# EAGLE board ATmga8_testBoard_v3 (EAGLE 6.5.0)
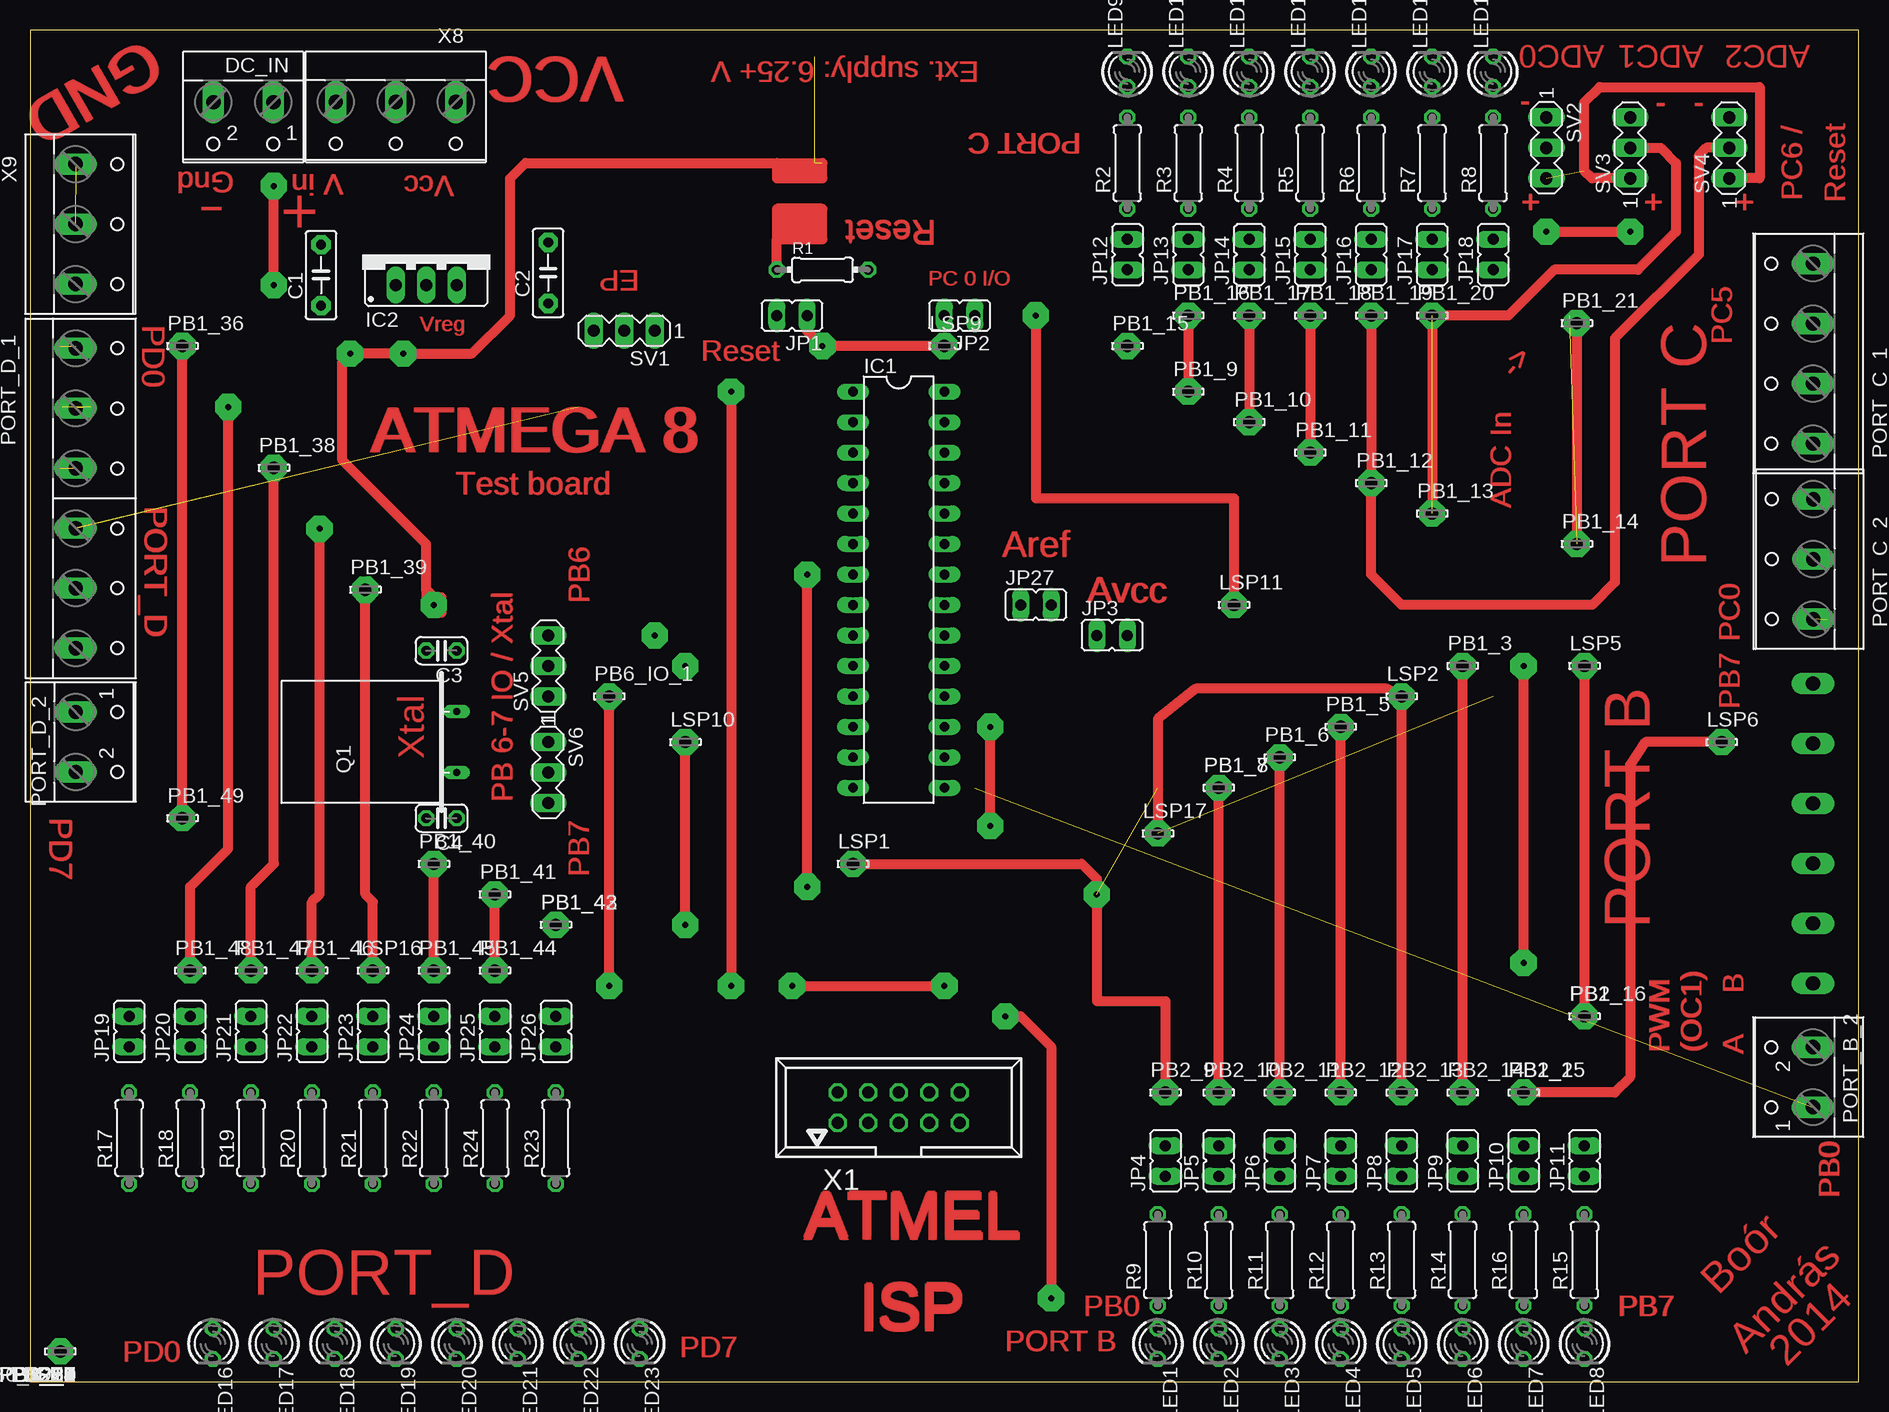
[diagram p0: board, top side]
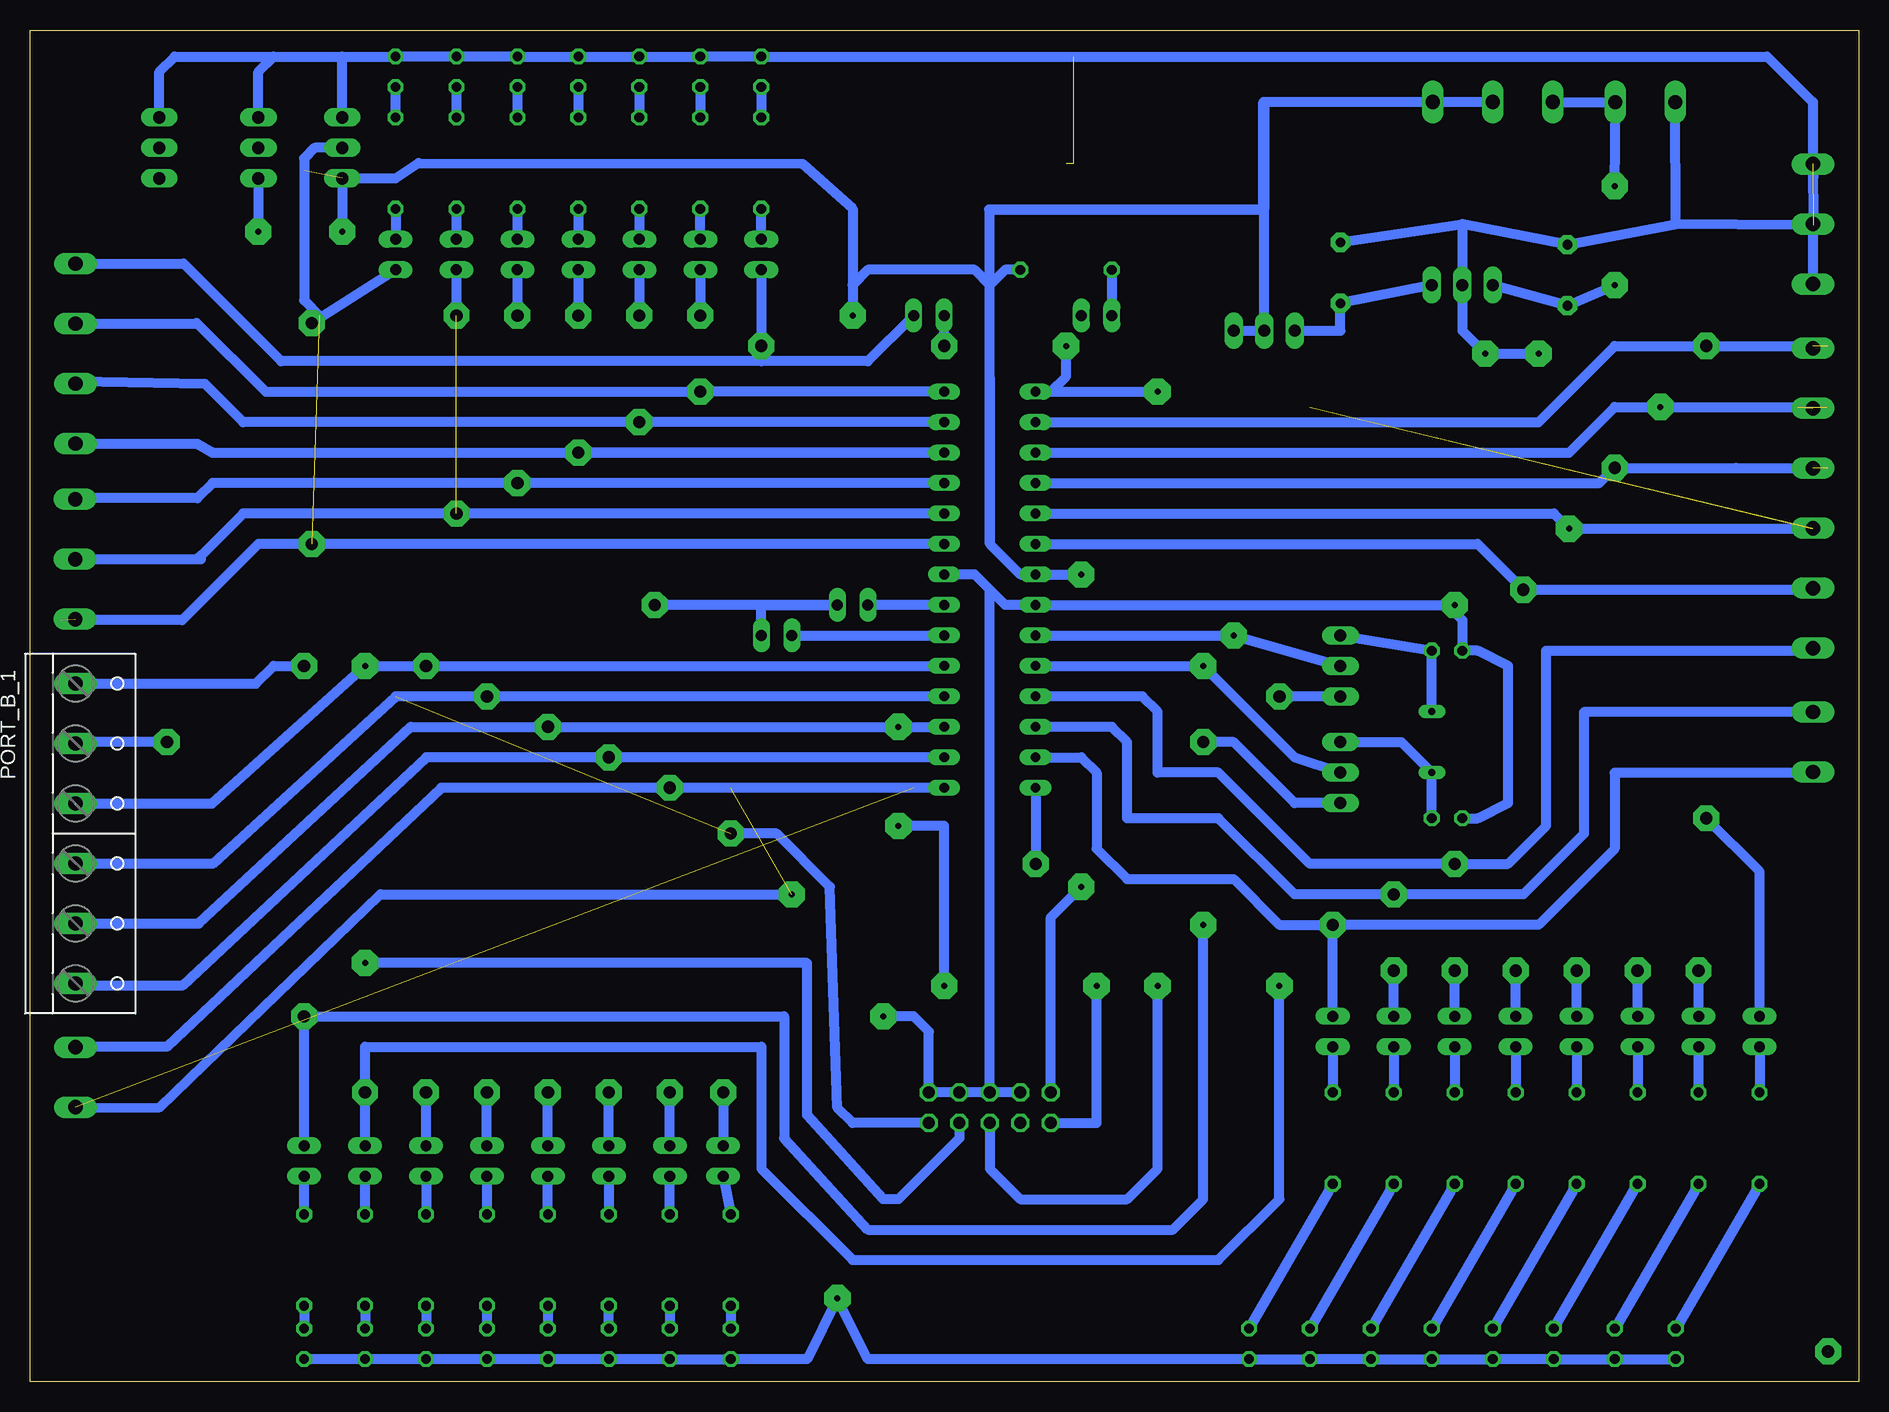
[diagram p1: board, bottom side, seen from below]

Size 152.38 x 112.7 mm. Coordinates in mm from the lower left corner, seen from the top.
Outline: 0,0 152.38,0 152.38,112.7 0,112.7 0,0
Copper layers (1*16): Top 0.035mm / dielectric 1.5mm / Bottom 0.035mm
Design rules "default": minimum track width 10mil, minimum drill 24mil, track to track 8mil, track to pad 8mil, pad to pad 8mil, via to via 8mil, smd to smd 8mil, copper to edge 40mil, drill to drill 8mil, minimum pad ring 10mil, minimum via ring 8mil, stop-mask expansion 4mil, vias tented up to drill 0mil, thermal gap 10mil

## Footprints (pad centres in the part's own frame; a part is rotated, then mirrored left to right if it is on the bottom)
C5B2.5 = drill 0.813 pad 1.6 octagon: 1 -2.54,0; 2 2.54,0
C025-024X044 = drill 0.813 octagon: 1 -1.27,0; 2 1.27,0
W237-102 = drill 1.194 long: 1 -2.5,-1.27; 2 2.5,-1.27
DIL28-3 = drill 0.813 long: 1 -16.51,-3.81; 2 -13.97,-3.81; 3 -11.43,-3.81; 4 -8.89,-3.81; 5 -6.35,-3.81; 6 -3.81,-3.81; 7 -1.27,-3.81; 8 1.27,-3.81; 9 3.81,-3.81; 10 6.35,-3.81; 11 8.89,-3.81; 12 11.43,-3.81; 13 13.97,-3.81; 14 16.51,-3.81; 15 16.51,3.81; 16 13.97,3.81; 17 11.43,3.81; 18 8.89,3.81; 19 6.35,3.81; 20 3.81,3.81; 21 1.27,3.81; 22 -1.27,3.81; 23 -3.81,3.81; 24 -6.35,3.81; 25 -8.89,3.81; 26 -11.43,3.81; 27 -13.97,3.81; 28 -16.51,3.81
78XXS = drill 1.016 long: GND 0,-2.54; IN -2.54,-2.54; OUT 2.54,-2.54
JP1 = drill 0.914 long: 1 0,-1.27; 2 0,1.27
LED3MM = drill 0.813 octagon: A -1.27,0; K 1.27,0
LSP10 = drill 1.016 pad 2.159 octagon: MP 0,0
W237-6 = drill 1.194 long: 1 -12.5,-1.27; 2 -7.5,-1.27; 3 -2.5,-1.27; 4 2.5,-1.27; 5 7.5,-1.27; 6 12.5,-1.27
W237-4 = drill 1.194 long: 1 -7.5,-1.27; 2 -2.5,-1.27; 3 2.5,-1.27; 4 7.5,-1.27
W237-103 = drill 1.194 long: 1 -5,-1.29; 2 0,-1.29; 3 5,-1.29
Q = drill 0.61 long: 1 -2.54,-7.62; 2 2.54,-7.62
0204/7 = drill 0.813 octagon: 1 -3.81,0; 2 3.81,0
0207/7 = drill 0.813 octagon: 1 -3.81,0; 2 3.81,0
MA03-1 = drill 1.016 long: 1 -2.54,0; 2 0,0; 3 2.54,0
057-010-1 = drill 1 octagon: 1 -5.08,-1.27; 2 -5.08,1.27; 3 -2.54,-1.27; 4 -2.54,1.27; 5 0,-1.27; 6 0,1.27; 7 2.54,-1.27; 8 2.54,1.27; 9 5.08,-1.27; 10 5.08,1.27

## Placement (x,y rotation side)
C1  0.33_uF  [C5B2.5]  24.26,92.27 90 top
C2  0.33_uF  [C5B2.5]  43.18,92.46 90 top
C3  [C025-024X044]  34.29,60.96 180 top
C4  [C025-024X044]  34.29,46.99 180 top
DC_IN  [W237-102]  17.78,105.41 180 top
IC1  ATmega8  [DIL28-3]  72.39,66.04 270 top
IC2  7805_CV  [78XXS]  33.02,93.98 0 top
JP1  PC0_Reset  [JP1]  63.5,88.9 90 top
JP2  PC0_IO  [JP1]  77.47,88.9 90 top
JP3  [JP1]  90.17,62.23 270 top
JP4  [JP1]  94.61,18.41 0 top
JP5  [JP1]  99.06,18.41 0 top
JP6  [JP1]  104.14,18.41 0 top
JP7  [JP1]  109.22,18.41 0 top
JP8  [JP1]  114.3,18.41 0 top
JP9  [JP1]  119.38,18.41 0 top
JP10  [JP1]  124.46,18.41 0 top
JP11  [JP1]  129.54,18.41 0 top
JP12  [JP1]  91.44,93.98 0 top
JP13  [JP1]  96.52,93.98 0 top
JP14  [JP1]  101.6,93.98 0 top
JP15  [JP1]  106.68,93.98 0 top
JP16  [JP1]  111.76,93.98 0 top
JP17  [JP1]  116.84,93.98 0 top
JP18  [JP1]  121.92,93.98 0 top
JP19  [JP1]  8.26,29.21 0 top
JP20  [JP1]  13.34,29.21 0 top
JP21  [JP1]  18.41,29.21 0 top
JP22  [JP1]  23.5,29.21 0 top
JP23  [JP1]  28.57,29.21 0 top
JP24  [JP1]  33.66,29.21 0 top
JP25  [JP1]  38.73,29.21 0 top
JP26  [JP1]  43.81,29.21 0 top
JP27  VREF_VCC  [JP1]  83.82,64.77 270 top
LED1  [LED3MM]  93.98,3.17 270 top
LED2  [LED3MM]  99.06,3.17 270 top
LED3  [LED3MM]  104.14,3.17 270 top
LED4  [LED3MM]  109.22,3.17 270 top
LED5  [LED3MM]  114.3,3.17 270 top
LED6  [LED3MM]  119.38,3.17 270 top
LED7  [LED3MM]  124.46,3.17 270 top
LED8  [LED3MM]  129.54,3.17 270 top
LED9  [LED3MM]  91.44,109.22 90 top
LED10  [LED3MM]  96.52,109.22 90 top
LED11  [LED3MM]  101.6,109.22 90 top
LED12  [LED3MM]  106.68,109.22 90 top
LED13  [LED3MM]  111.76,109.22 90 top
LED14  [LED3MM]  116.84,109.22 90 top
LED15  [LED3MM]  121.92,109.22 90 top
LED16  [LED3MM]  15.24,3.17 270 top
LED17  [LED3MM]  20.32,3.17 270 top
LED18  [LED3MM]  25.4,3.17 270 top
LED19  [LED3MM]  30.48,3.17 270 top
LED20  [LED3MM]  35.56,3.17 270 top
LED21  [LED3MM]  40.64,3.17 270 top
LED22  [LED3MM]  45.72,3.17 270 top
LED23  [LED3MM]  50.8,3.17 270 top
LSP1  LSP10  [LSP10]  68.58,43.18 0 top
LSP2  LSP10  [LSP10]  114.3,57.15 0 top
LSP3  LSP10  [LSP10]  2.54,2.54 180 top
LSP4  LSP10  [LSP10]  2.54,2.54 180 top
LSP5  LSP10  [LSP10]  129.54,59.69 0 top
LSP6  LSP10  [LSP10]  140.97,53.34 0 top
LSP7  LSP10  [LSP10]  2.54,2.54 180 top
LSP8  LSP10  [LSP10]  2.54,2.54 180 top
LSP9  LSP10  [LSP10]  76.2,86.36 0 top
LSP10  LSP10  [LSP10]  54.61,53.34 0 top
LSP11  LSP10  [LSP10]  100.33,64.77 0 top
LSP12  LSP10  [LSP10]  2.54,2.54 180 top
LSP13  LSP10  [LSP10]  2.54,2.54 180 top
LSP14  LSP10  [LSP10]  2.54,2.54 180 top
LSP15  LSP10  [LSP10]  2.54,2.54 180 top
LSP16  LSP10  [LSP10]  28.57,34.29 0 top
LSP17  LSP10  [LSP10]  93.98,45.72 0 top
LSP18  LSP10  [LSP10]  2.54,2.54 180 top
LSP19  LSP10  [LSP10]  2.54,2.54 180 top
PB1_1  LSP10  [LSP10]  129.54,30.48 0 top
PB1_2  LSP10  [LSP10]  124.46,24.13 0 top
PB1_3  LSP10  [LSP10]  119.38,59.69 0 top
PB1_5  LSP10  [LSP10]  109.22,54.61 0 top
PB1_6  LSP10  [LSP10]  104.14,52.07 0 top
PB1_7  LSP10  [LSP10]  99.06,49.53 0 top
PB1_8  LSP10  [LSP10]  99.06,49.53 0 top
PB1_9  LSP10  [LSP10]  96.52,82.55 0 top
PB1_10  LSP10  [LSP10]  101.6,80.01 0 top
PB1_11  LSP10  [LSP10]  106.68,77.47 0 top
PB1_12  LSP10  [LSP10]  111.76,74.93 0 top
PB1_13  LSP10  [LSP10]  116.84,72.39 0 top
PB1_14  LSP10  [LSP10]  128.91,69.85 0 top
PB1_15  LSP10  [LSP10]  91.44,86.36 0 top
PB1_16  LSP10  [LSP10]  96.52,88.9 0 top
PB1_17  LSP10  [LSP10]  101.6,88.9 0 top
PB1_18  LSP10  [LSP10]  106.68,88.9 0 top
PB1_19  LSP10  [LSP10]  111.76,88.9 0 top
PB1_20  LSP10  [LSP10]  116.84,88.9 0 top
PB1_21  LSP10  [LSP10]  128.91,88.27 0 top
PB1_22  LSP10  [LSP10]  2.54,2.54 180 top
PB1_23  LSP10  [LSP10]  2.54,2.54 180 top
PB1_24  LSP10  [LSP10]  2.54,2.54 180 top
PB1_25  LSP10  [LSP10]  2.54,2.54 180 top
PB1_26  LSP10  [LSP10]  2.54,2.54 180 top
PB1_27  LSP10  [LSP10]  2.54,2.54 180 top
PB1_28  LSP10  [LSP10]  2.54,2.54 180 top
PB1_29  LSP10  [LSP10]  2.54,2.54 180 top
PB1_30  LSP10  [LSP10]  2.54,2.54 180 top
PB1_31  LSP10  [LSP10]  2.54,2.54 180 top
PB1_32  LSP10  [LSP10]  2.54,2.54 180 top
PB1_33  LSP10  [LSP10]  2.54,2.54 180 top
PB1_34  LSP10  [LSP10]  2.54,2.54 180 top
PB1_35  LSP10  [LSP10]  2.54,2.54 180 top
PB1_36  LSP10  [LSP10]  12.7,86.36 0 top
PB1_37  LSP10  [LSP10]  2.54,2.54 180 top
PB1_38  LSP10  [LSP10]  20.32,76.2 0 top
PB1_39  LSP10  [LSP10]  27.94,66.04 0 top
PB1_40  LSP10  [LSP10]  33.66,43.18 0 top
PB1_41  LSP10  [LSP10]  38.73,40.64 0 top
PB1_42  LSP10  [LSP10]  43.81,38.1 0 top
PB1_43  LSP10  [LSP10]  43.81,38.1 0 top
PB1_44  LSP10  [LSP10]  38.73,34.29 0 top
PB1_45  LSP10  [LSP10]  33.66,34.29 0 top
PB1_46  LSP10  [LSP10]  23.5,34.29 0 top
PB1_47  LSP10  [LSP10]  18.41,34.29 0 top
PB1_48  LSP10  [LSP10]  13.34,34.29 0 top
PB1_49  LSP10  [LSP10]  12.7,46.99 0 top
PB1_50  LSP10  [LSP10]  2.54,2.54 180 top
PB1_51  LSP10  [LSP10]  2.54,2.54 180 top
PB1_52  LSP10  [LSP10]  2.54,2.54 180 top
PB1_53  LSP10  [LSP10]  2.54,2.54 180 top
PB1_54  LSP10  [LSP10]  2.54,2.54 180 top
PB1_55  LSP10  [LSP10]  2.54,2.54 180 top
PB1_56  LSP10  [LSP10]  2.54,2.54 180 top
PB1_57  LSP10  [LSP10]  2.54,2.54 180 top
PB1_58  LSP10  [LSP10]  2.54,2.54 180 top
PB1_59  LSP10  [LSP10]  2.54,2.54 180 top
PB1_60  LSP10  [LSP10]  2.54,2.54 180 top
PB1_61  LSP10  [LSP10]  2.54,2.54 180 top
PB1_62  LSP10  [LSP10]  2.54,2.54 180 top
PB2_1  LSP10  [LSP10]  2.54,2.54 180 top
PB2_2  LSP10  [LSP10]  2.54,2.54 180 top
PB2_3  LSP10  [LSP10]  2.54,2.54 180 top
PB2_4  LSP10  [LSP10]  2.54,2.54 180 top
PB2_5  LSP10  [LSP10]  2.54,2.54 180 top
PB2_6  LSP10  [LSP10]  2.54,2.54 180 top
PB2_7  LSP10  [LSP10]  2.54,2.54 180 top
PB2_8  LSP10  [LSP10]  2.54,2.54 180 top
PB2_9  LSP10  [LSP10]  94.61,24.13 0 top
PB2_10  LSP10  [LSP10]  99.06,24.13 0 top
PB2_11  LSP10  [LSP10]  104.14,24.13 0 top
PB2_12  LSP10  [LSP10]  109.22,24.13 0 top
PB2_13  LSP10  [LSP10]  114.3,24.13 0 top
PB2_14  LSP10  [LSP10]  119.38,24.13 0 top
PB2_15  LSP10  [LSP10]  124.46,24.13 0 top
PB2_16  LSP10  [LSP10]  129.54,30.48 0 top
PB2_17  LSP10  [LSP10]  2.54,2.54 180 top
PB2_18  LSP10  [LSP10]  2.54,2.54 180 top
PB2_19  LSP10  [LSP10]  2.54,2.54 180 top
PB2_20  LSP10  [LSP10]  2.54,2.54 180 top
PB2_21  LSP10  [LSP10]  2.54,2.54 180 top
PB2_22  LSP10  [LSP10]  2.54,2.54 180 top
PB2_23  LSP10  [LSP10]  2.54,2.54 180 top
PB6_IO_1  LSP10  [LSP10]  48.26,57.15 0 top
PB6_IO_2  LSP10  [LSP10]  2.54,2.54 180 top
PORT_B_1  [W237-6]  147.32,45.72 270 bottom
PORT_B_2  [W237-102]  147.32,25.4 90 top
PORT_C_1  [W237-4]  147.32,85.72 90 top
PORT_C_2  [W237-103]  147.32,68.58 90 top
PORT_D_1  PORT_D  [W237-6]  5.08,73.66 270 top
PORT_D_2  [W237-102]  5.08,53.34 270 top
Q1  [Q]  27.94,53.34 90 top
R1  10k  [0204/7]  66.04,92.71 0 top
R2  470R  [0207/7]  91.44,101.6 90 top
R3  470R  [0207/7]  96.52,101.6 90 top
R4  470R  [0207/7]  101.6,101.6 90 top
R5  470R  [0207/7]  106.68,101.6 90 top
R6  470R  [0207/7]  111.76,101.6 90 top
R7  470R  [0207/7]  116.84,101.6 90 top
R8  470R  [0207/7]  121.92,101.6 90 top
R9  470R  [0207/7]  93.98,10.16 90 top
R10  470R  [0207/7]  99.06,10.16 90 top
R11  470R  [0207/7]  104.14,10.16 90 top
R12  470R  [0207/7]  109.22,10.16 90 top
R13  470R  [0207/7]  114.3,10.16 90 top
R14  470R  [0207/7]  119.38,10.16 90 top
R15  470R  [0207/7]  129.54,10.16 90 top
R16  470R  [0207/7]  124.46,10.16 90 top
R17  470R  [0207/7]  8.26,20.32 90 top
R18  470R  [0207/7]  13.34,20.32 90 top
R19  470R  [0207/7]  18.41,20.32 90 top
R20  470R  [0207/7]  23.5,20.32 90 top
R21  470R  [0207/7]  28.57,20.32 90 top
R22  470R  [0207/7]  33.66,20.32 90 top
R23  470R  [0207/7]  43.81,20.32 90 top
R24  470R  [0207/7]  38.73,20.32 90 top
SV1  Power  [MA03-1]  49.53,87.63 180 top
SV2  Pot 1  [MA03-1]  126.36,102.87 270 top
SV3  Pot 2  [MA03-1]  133.35,102.87 90 top
SV4  Pot 3  [MA03-1]  141.6,102.87 90 top
SV5  Xtal/PB6  [MA03-1]  43.18,59.69 90 top
SV6  Xtal/PB7  [MA03-1]  43.18,50.8 270 top
X1  057-010-1  [057-010-1]  72.39,22.86 0 top
X8  VCC_out  [W237-103]  30.48,105.41 180 top
X9  GND_out  [W237-103]  5.08,96.52 270 top

## Library data of the parts
C1 C2 = capacitor-wima
C3 C4 R2-R24 = rcl
DC_IN PORT_B_2 PORT_D_2 = con-wago-500; MPN: 237-102; OC_FARNELL: unknown; OC_NEWARK: 70K9898
IC1 = ic-package
IC2 = v-reg
JP1-JP27 = jumper
LED1-LED23 = led
LSP1-LSP19 PB1_1-PB1_3 PB1_5-PB1_62 PB2_1-PB2_23 PB6_IO_1 PB6_IO_2 = solpad
PORT_B_1 PORT_C_1 PORT_D_1 = con-wago-500; OC_FARNELL: unknown; OC_NEWARK: unknown
PORT_C_2 X8 X9 = con-wago-500; MPN: 237-103; OC_FARNELL: unknown; OC_NEWARK: 18M7116
Q1 = special
R1 = resistor
SV1-SV6 = con-lstb; OC_FARNELL: unknown; OC_NEWARK: unknown
X1 = con-panduit; OC_FARNELL: unknown; OC_NEWARK: unknown

## Nets
AVCC: IC1.19 PB1_3.MP PORT_B_1.3 X1.7
GND: C1.2 C2.2 C3.2 C4.2 DC_IN.2 IC1.8 IC1.22 IC2.GND LED1.K LED2.K LED3.K LED4.K LED5.K LED6.K LED7.K LED8.K LED9.K LED10.K LED11.K LED12.K LED13.K LED14.K LED15.K LED16.K LED17.K LED18.K LED19.K LED20.K LED21.K LED22.K LED23.K SV2.1 SV3.3 SV4.3 X1.4 X1.6 X1.8 X1.10
N$1: C2.1 IC2.OUT SV1.3
N$2: C1.1 DC_IN.1 IC2.IN X8.3
N$3: IC1.1 JP1.1 JP2.2 LSP9.MP X1.5
N$4: LSP6.MP PB1_2.MP PORT_B_1.2
N$5: IC1.14 LSP1.MP
N$6: LSP3.MP LSP4.MP
N$7: LSP5.MP PB1_1.MP PORT_B_1.1
N$8: PB1_22.MP PB2_1.MP
N$9: PB1_23.MP PB2_2.MP
N$10: PB1_24.MP PB2_3.MP
N$11: LSP13.MP PB2_4.MP
N$12: LSP8.MP PB6_IO_2.MP
N$13: IC1.20 JP3.1
N$14: LSP7.MP LSP12.MP
N$15: IC1.23 PB1_14.MP PORT_C_2.1 SV2.2
N$16: IC1.24 PB1_13.MP PORT_C_2.2 SV3.2
N$17: IC1.25 PB1_12.MP PORT_C_2.3 SV4.2
N$18: IC1.26 PB1_11.MP PORT_C_1.1
N$19: IC1.27 PB1_10.MP PORT_C_1.2
N$20: IC1.28 PB1_9.MP PORT_C_1.3
N$21: JP2.1 PORT_C_1.4
N$22: JP1.2 R1.1
N$23: PB1_25.MP PB2_5.MP
N$24: PB1_26.MP PB2_6.MP
N$25: IC1.10 SV6.2
N$26: IC1.9 SV5.2
N$27: IC1.2 PB1_36.MP PORT_D_1.1
N$28: IC1.3 PB1_37.MP PORT_D_1.2
N$29: IC1.4 PB1_38.MP PORT_D_1.3
N$30: IC1.5 LSP15.MP PORT_D_1.4
N$31: IC1.6 PB1_39.MP PORT_D_1.5
N$32: PB1_28.MP PB2_8.MP
N$33: C4.1 Q1.1 SV6.1
N$34: C3.1 Q1.2 SV5.3
N$35: LSP10.MP SV6.3
N$36: PB6_IO_1.MP SV5.1
N$37: IC1.11 PB1_40.MP PORT_D_1.6
N$38: IC1.12 PB1_41.MP PORT_D_2.1
N$39: IC1.13 PB1_42.MP PORT_D_2.2
N$40: IC1.18 LSP17.MP PORT_B_1.4 X1.9
N$41: IC1.17 PB1_5.MP PORT_B_1.5 X1.1
N$42: IC1.16 PB1_6.MP PORT_B_1.6
N$43: IC1.15 PB1_7.MP PORT_B_2.1
N$44: LSP2.MP PB1_8.MP PORT_B_2.2
N$45: PB1_27.MP PB2_7.MP
N$46: IC1.21 JP27.1
N$47: JP4.1 R9.2
N$48: JP5.1 R10.2
N$49: JP6.1 R11.2
N$50: JP7.1 R12.2
N$51: JP8.1 R13.2
N$52: JP9.1 R14.2
N$53: JP11.1 R15.2
N$54: JP10.1 R16.2
N$55: JP12.1 PB1_15.MP
N$56: JP13.1 PB1_16.MP
N$57: JP14.1 PB1_17.MP
N$58: JP15.1 PB1_18.MP
N$59: JP16.1 PB1_19.MP
N$60: JP17.1 PB1_20.MP
N$61: JP18.1 PB1_21.MP
N$62: JP12.2 R2.1
N$63: JP13.2 R3.1
N$64: JP14.2 R4.1
N$65: JP15.2 R5.1
N$66: JP16.2 R6.1
N$67: JP17.2 R7.1
N$68: JP18.2 R8.1
N$69: LED1.A R9.1
N$70: LED2.A R10.1
N$71: LED3.A R11.1
N$72: LED4.A R12.1
N$73: LED5.A R13.1
N$74: LED7.A R16.1
N$75: LED6.A R14.1
N$76: LED8.A R15.1
N$77: LED9.A R2.2
N$78: LED10.A R3.2
N$79: LED11.A R4.2
N$80: LED12.A R5.2
N$81: LED13.A R6.2
N$82: LED14.A R7.2
N$83: LED15.A R8.2
N$84: JP4.2 PB2_9.MP
N$85: JP5.2 PB2_10.MP
N$86: JP6.2 PB2_11.MP
N$87: JP7.2 PB2_12.MP
N$88: JP8.2 PB2_13.MP
N$89: JP9.2 PB2_14.MP
N$90: JP10.2 PB2_15.MP
N$91: JP11.2 PB2_16.MP
N$92: PB1_35.MP PB1_50.MP
N$93: PB1_34.MP PB1_51.MP
N$94: PB1_33.MP PB1_52.MP
N$95: LSP18.MP PB1_32.MP
N$96: LSP14.MP PB1_53.MP
N$97: PB1_31.MP PB1_54.MP
N$98: PB1_30.MP PB1_55.MP
N$99: PB1_29.MP PB1_56.MP
N$100: JP19.1 R17.2
N$101: JP20.1 R18.2
N$102: JP21.1 R19.2
N$103: JP22.1 R20.2
N$104: JP23.1 R21.2
N$105: JP24.1 R22.2
N$106: JP26.1 R23.2
N$107: JP25.1 R24.2
N$108: LED16.A R17.1
N$109: LED17.A R18.1
N$110: LED18.A R19.1
N$111: LED19.A R20.1
N$112: LED20.A R21.1
N$113: LED22.A R24.1
N$114: LED21.A R22.1
N$115: LED23.A R23.1
N$116: JP19.2 PB1_49.MP
N$117: JP20.2 PB1_48.MP
N$118: JP21.2 PB1_47.MP
N$119: JP22.2 PB1_46.MP
N$120: JP23.2 LSP16.MP
N$121: JP24.2 PB1_45.MP
N$122: JP25.2 PB1_44.MP
N$123: JP26.2 PB1_43.MP
N$124: PB1_57.MP PB2_17.MP
N$125: PB1_58.MP PB2_18.MP
N$126: LSP19.MP PB2_19.MP
N$127: PB1_59.MP PB2_20.MP
N$128: PB1_60.MP PB2_21.MP
N$129: PB1_61.MP PB2_22.MP
N$130: PB1_62.MP PB2_23.MP
N$131: SV1.1 X1.2
N$137: X9.1 X9.2 X9.3
VCC: IC1.7 JP3.2 JP27.2 LSP11.MP R1.2 SV1.2 SV2.3 SV3.1 SV4.1 X8.1 X8.2

## Tracks (layer width: path | path; a pad name or v marks a point on that pad's centre or on a via)
AVCC  (via drill 0.5 pad 2.18)
  Top 0.813: v124.46,34.92 v124.46,59.69
  Bottom 0.813: PORT_B_1.3 137.2,48.22 v124.46,59.69 PB1_3.MP IC1.19 | X1.7 74.93,20.32 80.01,15.24 81.28,15.24 87.63,22.23 87.63,34.92 v124.46,34.92
GND  (via drill 0.5 pad 2.18)  (3 unrouted)
  Top 0.813: v81.28,30.48 82.55,30.48 85.09,27.94 v85.09,6.99 | 62.23,101.6 41.27,101.6 40.01,100.33 40.01,88.9 36.83,85.72 v31.11,85.72 v26.67,85.72 26.04,85.09 26.04,76.83 33.02,69.85 33.02,66.04 | 62.23,101.6 65.41,101.6 | 65.41,101.6 66.04,101.6 66.04,100.33 62.23,100.33 62.23,101.6 | 65.41,101.6 65.41,100.97 62.87,100.97 | v33.66,64.77 33.66,65.41 | 33.66,65.41 33.02,66.04 | 33.02,66.04 33.02,64.77 33.66,64.14 34.29,64.14 34.29,65.41 33.66,65.41
  Bottom 0.813: C4.2 31.75,46.99 29.21,48.26 29.21,59.69 31.75,60.96 C3.2 33.02,63.5 34.29,64.77 | 72.39,66.04 71.12,64.77 IC1.8 34.29,64.77 | 72.39,66.04 73.66,67.31 IC1.22 | X1.6 72.39,66.04 | X1.6 X1.8 X1.10 77.47,29.21 78.74,30.48 v81.28,30.48 | X1.4 X1.6 | LED8.K LED7.K LED6.K LED5.K LED4.K LED3.K LED2.K LED1.K 87.63,1.91 v85.09,6.99 82.55,1.91 LED23.K LED22.K LED21.K LED20.K LED19.K LED18.K LED17.K LED16.K | 15.24,96.52 C1.2 33.02,96.52 | 15.24,96.52 15.24,96.48 DC_IN.2 15.24,96.52 | 33.02,96.52 IC2.GND 33.02,87.63 v31.11,85.72 v26.67,85.72 | C2.2 33.02,96.52 | 3.77,96.44 5,96.44 15.24,96.52 | 3.81,101.54 3.81,106.68 7.62,110.49 LED9.K LED10.K LED11.K LED12.K LED13.K LED14.K LED15.K 126.36,110.49 | SV2.1 126.36,110.49 | SV3.3 133.35,109.22 132.08,110.49 | 132.08,110.49 126.36,110.49 | SV4.3 141.6,109.22 140.34,110.49 132.08,110.49 | 34.29,64.77 v33.66,64.77
N$1
  Bottom 0.813: IC2.OUT C2.1 43.18,87.63 SV1.3
N$2  (via drill 0.5 pad 2.18)  (1 unrouted)
  Top 0.813: v20.32,91.44 20.32,99.69
  Bottom 0.813: IC2.IN C1.1 v20.32,91.44 | 20.32,99.69 20.36,99.73 DC_IN.1 20.28,106.7 X8.3
N$3  (via drill 0.5 pad 2.18)  (1 unrouted)
  Top 0.813: JP1.1 64.77,87.63 66.04,86.36 LSP9.MP | v58.42,82.55 v58.42,33.02
  Bottom 0.813: IC1.1 67.31,82.55 | 67.31,82.55 66.04,83.82 66.04,86.36 | LSP9.MP JP2.2 | X1.5 72.39,17.78 69.85,15.24 60.96,15.24 58.42,17.78 v58.42,33.02 | 67.31,82.55 v58.42,82.55
N$4  (1 unrouted)
  Top 0.813: LSP6.MP 134.62,53.34 133.35,51.44 133.35,25.4 132.08,24.13 PB1_2.MP
  Bottom 0.813: LSP6.MP 149.74,53.34 PORT_B_1.2
N$5
  Top 0.813: LSP1.MP 87.63,43.18 88.9,41.91 88.9,31.75 94.61,31.75 94.61,24.77
  Bottom 0.813: IC1.14 LSP1.MP
N$6  (1 unrouted)
N$7
  Top 0.813: LSP5.MP PB1_1.MP
  Bottom 0.813: 148.79,58.22 PORT_B_1.1 133.55,58.22 132.08,59.69 LSP5.MP
N$8  (1 unrouted)
N$9  (1 unrouted)
N$10  (1 unrouted)
N$11  (1 unrouted)
N$12  (1 unrouted)
N$13
  Bottom 0.813: JP3.1 IC1.20
N$14  (1 unrouted)
N$15  (2 unrouted)
  Bottom 0.813: IC1.23 PB1_14.MP 133.35,69.85 139.7,63.5 149.76,63.5 | SV2.2 128.65,102.87 129.54,101.98 129.54,90.17 128.27,88.9 128.91,88.9
N$16  (1 unrouted)
  Top 0.813: SV3.2 135.89,102.87 137.16,101.6 137.16,95.89 133.99,92.71 127,92.71 123.19,88.9 116.84,88.9
  Bottom 0.813: IC1.24 PB1_13.MP 134.62,72.39 138.11,68.9 | 138.11,68.9 138.43,68.58 | PORT_C_2.2 138.11,68.58 138.11,68.9
N$17
  Top 0.813: SV4.2 139.7,102.87 139.06,102.23 139.06,93.98 132.08,87 132.08,66.67 130.18,64.77 114.3,64.77 111.76,67.31 PB1_12.MP
  Bottom 0.813: IC1.25 PB1_12.MP 137.16,74.93 138.43,73.66 148.61,73.66 PORT_C_2.3
N$18
  Bottom 0.813: 148.71,78.22 138.42,78.22 | 138.42,78.22 137.16,77.47 IC1.26 PB1_11.MP | PORT_C_1.1 138.42,78.22
N$19
  Bottom 0.813: 148.59,83.37 137.79,83.19 134.62,80.01 IC1.27 PB1_10.MP | 148.59,83.37 148.8,83.38 | PORT_C_1.2 148.59,83.37
N$20
  Bottom 0.813: IC1.28 PB1_9.MP 132.72,82.55 138.52,88.29 138.52,88.22 PORT_C_1.3
N$21
  Bottom 0.813: JP2.1 82.55,85.09 131.44,85.09 139.58,93.22 PORT_C_1.4
N$22
  Top 0.813: R1.1 62.23,95.25 | 62.23,95.25 66.04,95.25 66.04,97.79 62.23,97.79 62.23,97.16 | 62.23,97.16 62.23,95.89 | 64.14,95.89 65.41,95.89 65.41,97.16 62.23,97.16 | 62.23,97.16 62.87,96.52 64.77,96.52 64.14,95.89 | 64.14,95.89 62.23,95.89 | 62.23,95.89 62.23,95.25
  Bottom 0.813: R1.1 JP1.2
N$23  (1 unrouted)
N$24  (1 unrouted)
N$25  (via drill 0.5 pad 2.18)
  Bottom 0.813: IC1.10 v54.61,59.69 46.99,52.07 SV6.2
N$26  (via drill 0.5 pad 2.18)
  Bottom 0.813: IC1.9 v52.07,62.23 SV5.2
N$27  (via drill 0.5 pad 2.18)  (1 unrouted)
  Bottom 0.813: IC1.2 26.67,80.01 20.32,86.36 PB1_36.MP | PB1_36.MP 5.28,86.36 | 5.28,86.36 3.81,86.36 PORT_D_1.1 5.28,86.36 | PB1_36.MP 2.54,86.36
  other vias: 12.7,86.36
N$28  (via drill 0.5 pad 2.18)  (2 unrouted)
  Bottom 0.813: IC1.3 24.13,77.47 20.32,81.28 v16.51,81.28 2.66,81.28 PORT_D_1.2
N$29  (via drill 0.5 pad 2.18)  (1 unrouted)
  Bottom 0.813: IC1.4 21.59,74.93 PB1_38.MP | PB1_38.MP 10.2,76.2 PORT_D_1.3 | PB1_38.MP 3.81,76.2 | PB1_38.MP 2.54,76.2
  other vias: 20.32,76.2
N$30  (via drill 0.5 pad 2.18)  (2 unrouted)
  Bottom 0.813: IC1.5 25.4,72.39 v24.13,71.12 3.85,71.12 PORT_D_1.4
N$31  (via drill 0.5 pad 2.18)
  Bottom 0.813: IC1.6 31.75,69.85 PB1_39.MP 3.93,66.04 PORT_D_1.5
  other vias: 27.94,66.04
N$32  (1 unrouted)
N$33
  Bottom 0.813: SV6.1 38.1,53.34 Q1.1 C4.1
N$34
  Bottom 0.813: SV5.3 C3.1 Q1.2
N$35
  Bottom 0.813: SV6.3 46.99,48.26 52.07,53.34 LSP10.MP
N$36
  Bottom 0.813: SV5.1 PB6_IO_1.MP
N$37  (via drill 0.5 pad 2.18)
  Bottom 0.813: PORT_D_1.6 4.01,60.96 26.04,60.96 26.04,46.35 29.21,43.18 PB1_40.MP 45.72,43.18 53.34,50.8 58.42,50.8 58.42,55.88 59.69,57.15 IC1.11
  other vias: 33.66,43.18
N$38  (via drill 0.5 pad 2.18)
  Bottom 0.813: PORT_D_2.1 22.9,55.84 22.9,45.68 27.94,40.64 PB1_41.MP 46.99,40.64 53.34,46.99 60.96,46.99 60.96,53.34 62.23,54.61 IC1.12
  other vias: 38.73,40.64
N$39
  Bottom 0.813: IC1.13 64.77,52.07 63.5,50.8 63.5,44.45 60.96,41.91 52.07,41.91 48.26,38.1 PB1_42.MP 26.67,38.1 20.32,44.45 20.32,50.8 3.85,50.8 | 3.85,50.8 PORT_D_2.2 3.81,50.8 3.85,50.8
N$40  (1 unrouted)
  Bottom 0.813: IC1.18 121.92,57.15 137.16,43.18 149.82,43.18 PORT_B_1.4 | X1.9 83.82,21.59 85.09,22.86 85.72,41.27 90.17,45.72 LSP17.MP
N$41  (via drill 0.5 pad 2.18)
  Top 0.813: v63.5,33.02 v76.2,33.02 | v80.01,46.35 v80.01,54.61
  Bottom 0.813: PORT_B_1.5 138.31,38.22 120.65,54.61 PB1_5.MP v80.01,54.61 IC1.17 | X1.1 63.5,21.59 v63.5,33.02 | v76.2,33.02 76.2,46.35 v80.01,46.35
N$42
  Bottom 0.813: PORT_B_1.6 148.39,33.02 139.7,33.02 119.38,52.07 PB1_6.MP IC1.16
N$43  (via drill 0.5 pad 2.18)  (3 unrouted)
  Bottom 0.813: IC1.15 PB1_7.MP 118.11,49.53 | PORT_B_2.1 149.86,22.86 141.56,22.9 123.19,40.64 v88.9,40.64
N$44
  Bottom 0.813: PB1_8.MP 118.11,49.53 140.97,27.94 148.55,27.94 PORT_B_2.2
N$45  (1 unrouted)
N$46
  Bottom 0.813: IC1.21 JP27.1
N$47
  Bottom 0.813: JP4.1 R9.2
N$48
  Bottom 0.813: R10.2 JP5.1
N$49
  Bottom 0.813: JP6.1 R11.2
N$50
  Bottom 0.813: R12.2 JP7.1
N$51
  Bottom 0.813: JP8.1 R13.2
N$52
  Bottom 0.813: JP9.1 R14.2
N$53
  Bottom 0.813: R15.2 JP11.1
N$54
  Bottom 0.813: R16.2 JP10.1
N$55
  Bottom 0.813: JP12.1 PB1_15.MP 91.44,85.09
N$56
  Top 0.813: PB1_16.MP 96.52,82.55
  Bottom 0.813: JP13.1 PB1_16.MP
N$57
  Top 0.813: PB1_17.MP 101.6,80.01
  Bottom 0.813: JP14.1 PB1_17.MP
N$58
  Top 0.813: PB1_18.MP 106.68,77.47
  Bottom 0.813: JP15.1 PB1_18.MP
N$59
  Top 0.813: PB1_19.MP 111.76,74.93
  Bottom 0.813: JP16.1 PB1_19.MP
N$60
  Top 0.813: PB1_20.MP 116.84,72.39
  Bottom 0.813: JP17.1 PB1_20.MP
N$61
  Top 0.813: PB1_21.MP 128.91,69.85
  Bottom 0.813: JP18.1 PB1_21.MP
N$62
  Bottom 0.813: JP12.2 R2.1
N$63
  Bottom 0.813: JP13.2 R3.1
N$64
  Bottom 0.813: R4.1 JP14.2
N$65
  Bottom 0.813: R5.1 JP15.2
N$66
  Bottom 0.813: R6.1 JP16.2
N$67
  Bottom 0.813: R7.1 JP17.2
N$68
  Bottom 0.813: R8.1 JP18.2
N$69
  Bottom 0.813: R9.1 LED1.A
N$70
  Bottom 0.813: R10.1 LED2.A
N$71
  Bottom 0.813: LED3.A R11.1
N$72
  Bottom 0.813: R12.1 LED4.A
N$73
  Bottom 0.813: R13.1 LED5.A
N$74
  Bottom 0.813: R16.1 LED7.A
N$75
  Bottom 0.813: R14.1 LED6.A
N$76
  Bottom 0.813: R15.1 LED8.A
N$77
  Bottom 0.813: LED9.A R2.2
N$78
  Bottom 0.813: LED10.A R3.2
N$79
  Bottom 0.813: LED11.A R4.2
N$80
  Bottom 0.813: LED12.A R5.2
N$81
  Bottom 0.813: LED13.A R6.2
N$82
  Bottom 0.813: LED14.A R7.2
N$83
  Bottom 0.813: R8.2 LED15.A
N$84
  Bottom 0.813: PB2_9.MP JP4.2
N$85
  Top 0.813: PB2_10.MP 99.06,49.53
  Bottom 0.813: JP5.2 PB2_10.MP
N$86
  Top 0.813: PB2_11.MP 104.14,52.07
  Bottom 0.813: JP6.2 PB2_11.MP
N$87
  Top 0.813: PB2_12.MP 109.22,54.61
  Bottom 0.813: JP7.2 PB2_12.MP
N$88
  Top 0.813: PB2_13.MP 114.3,57.15 113.03,57.78 97.16,57.78 93.98,55.24 93.98,45.72
  Bottom 0.813: JP8.2 PB2_13.MP
N$89
  Top 0.813: PB2_14.MP 119.38,59.69
  Bottom 0.813: JP9.2 PB2_14.MP
N$90  (via drill 0.5 pad 2.18)
  Top 0.813: v48.26,33.02 48.26,57.15
  Bottom 0.813: v48.26,33.02 48.26,15.24 53.34,10.16 83.82,10.16 91.44,17.78 91.44,27.94 124.46,27.94 PB2_15.MP JP10.2
N$91  (via drill 0.5 pad 2.18)
  Top 0.813: v54.61,38.1 54.61,53.34
  Bottom 0.813: v54.61,38.1 54.61,15.24 57.15,12.7 82.55,12.7 89.53,20.32 89.53,30.48 PB2_16.MP JP11.2
N$92  (1 unrouted)
N$93  (1 unrouted)
N$94  (1 unrouted)
N$95  (1 unrouted)
N$96  (1 unrouted)
N$97  (1 unrouted)
N$98  (1 unrouted)
N$99  (1 unrouted)
N$100
  Bottom 0.813: JP19.1 R17.2
N$101
  Bottom 0.813: R18.2 JP20.1
N$102
  Bottom 0.813: JP21.1 R19.2
N$103
  Bottom 0.813: JP22.1 R20.2
N$104
  Bottom 0.813: JP23.1 R21.2
N$105
  Bottom 0.813: JP24.1 R22.2
N$106
  Bottom 0.813: JP26.1 R23.2
N$107
  Bottom 0.813: JP25.1 R24.2
N$108
  Bottom 0.813: R17.1 LED16.A
N$109
  Bottom 0.813: R18.1 LED17.A
N$110
  Bottom 0.813: LED18.A R19.1
N$111
  Bottom 0.813: R20.1 LED19.A
N$112
  Bottom 0.813: R21.1 LED20.A
N$113
  Bottom 0.813: R24.1 LED22.A
N$114
  Bottom 0.813: R22.1 LED21.A
N$115
  Bottom 0.813: R23.1 LED23.A
N$116
  Top 0.813: PB1_49.MP 12.7,86.36
  Bottom 0.813: JP19.2 8.26,42.55 PB1_49.MP
N$117
  Top 0.813: PB1_48.MP 13.34,41.27 16.51,44.45 16.51,81.28
  Bottom 0.813: JP20.2 PB1_48.MP
N$118
  Top 0.813: PB1_47.MP 18.41,41.27 20.32,43.18 20.32,76.2
  Bottom 0.813: JP21.2 PB1_47.MP
N$119
  Top 0.813: PB1_46.MP 23.5,40.01 24.13,40.64 24.13,71.12
  Bottom 0.813: JP22.2 PB1_46.MP
N$120
  Top 0.813: LSP16.MP 28.57,40.01 27.94,40.64 27.94,66.04
  Bottom 0.813: JP23.2 LSP16.MP
N$121
  Top 0.813: PB1_45.MP 33.66,43.18
  Bottom 0.813: JP24.2 PB1_45.MP
N$122
  Top 0.813: PB1_44.MP 38.73,40.01
  Bottom 0.813: JP25.2 PB1_44.MP
N$123
  Bottom 0.813: JP26.2 PB1_43.MP
N$124  (1 unrouted)
N$125  (1 unrouted)
N$126  (1 unrouted)
N$127  (1 unrouted)
N$128  (1 unrouted)
N$129  (1 unrouted)
N$130  (1 unrouted)
N$131  (via drill 0.5 pad 2.18)  (1 unrouted)
  Top 0.813: v64.77,41.27 64.77,67.31
  Bottom 0.813: X1.2 67.31,38.73 v64.77,41.27 | SV1.1 49.53,87.63 49.53,97.73 | 49.53,106.68 49.53,97.73 | 49.53,97.73 72.45,97.73 72.39,69.85 69.85,67.31 64.77,67.31
N$133  (via drill 0.5 pad 2.18)
  other vias: 66.04,86.36
N$135  (via drill 0.5 pad 2.18)
  other vias: 20.32,99.69
N$136  (via drill 0.5 pad 2.18)
  other vias: 64.77,67.31
N$137
  Bottom 0.813: X9.1 3.79,100.35 3.81,101.6 X9.2 X9.3
N$138  (via drill 0.5 pad 2.18)
  Top 0.813: v126.36,95.89 v133.35,95.89
VCC  (via drill 0.5 pad 2.18)  (1 unrouted)
  Top 0.813: v83.82,88.9 83.82,73.66 100.33,73.66 LSP11.MP | SV3.1 130.18,100.33 129.54,100.97 129.54,106.68 130.81,107.95 144.15,107.95 144.15,100.33 SV4.1
  Bottom 0.813: 72.39,91.44 72.39,69.85 69.85,67.31 IC1.7 64.77,67.31 | 72.39,91.44 72.39,97.73 49.59,97.73 49.59,106.68 49.56,106.62 49.56,106.52 49.53,106.58 | JP3.2 91.44,64.77 JP27.2 LSP11.MP | 72.39,91.44 73.66,92.71 82.55,92.71 83.82,91.44 v83.82,88.9 83.82,97.79 88.01,101.54 120.02,101.6 121.92,100.33 SV2.3 126.36,95.89 | SV1.2 49.53,106.58 | 49.53,106.58 49.53,106.7 X8.2 X8.1 | SV3.1 133.35,95.25 | R1.2 71.12,92.71 72.39,91.44

## Text on the board
Top: GND | GND | GND | VCC | VCC | VCC | ADC0 | ADC1 | ADC2 | Ext. supply: 6.25+ V | Ext. supply: 6.25+ V | - | - | - | - | - | - | - | PORT C | PORT C | PORT C | PC6 / / Reset | PC6 / / Reset | Gnd | Gnd | Gnd | V in | V in | V in | Vcc | Vcc | + | + | + | + | + | + | + | + | + | + | + | + | + | - | - | + | Reset | Reset | Reset | Reset | EP | EP | PC 0 I/O | PC 0 I/O | PC5 | PC5 | Vreg | Vreg | PD0 | PD0 | Reset | Reset | -> | -> | -> | ATMEGA 8 | ATMEGA 8 | ATMEGA 8 | ATMEGA 8 | ATMEGA 8 | ATMEGA 8 | ADC In | ADC In | Test board | Test board | Test board | Test board | PORT_D | PORT_D | PORT_D | Aref | Aref | Aref | PORT C | PB6 | PB6 | Avcc | Avcc | Avcc | PC0 | PC0 | PB7 | PB7 | PB 6-7 IO / Xtal | PB 6-7 IO / Xtal | Xtal | PB7 | PD7 | PD7 | PB7 | PORT B | B | B | PWM / (OC1) | PWM / (OC1) | A | A | PB0 | PB0 | ATMEL / ISP | ATMEL / ISP | ATMEL / ISP | ATMEL / ISP | ATMEL / ISP | ATMEL / ISP | Boór / András | PORT_D | PB0 | PB0 | PB7 | PB7 | 2014 | PD0 | PD0 | PD7 | PD7 | PORT B | PORT B | PORT B